# EAGLE board GOTEK Speaker Curcuit (EAGLE 9.6.1)
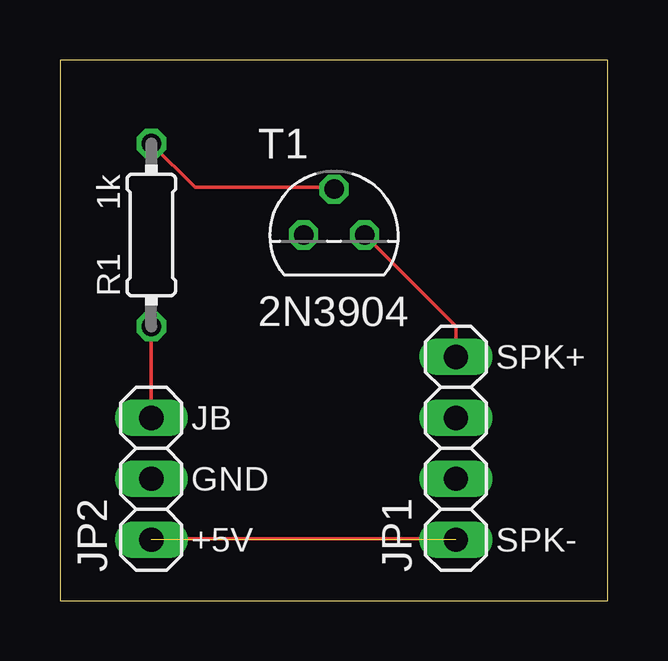
[diagram p0: board, top side]
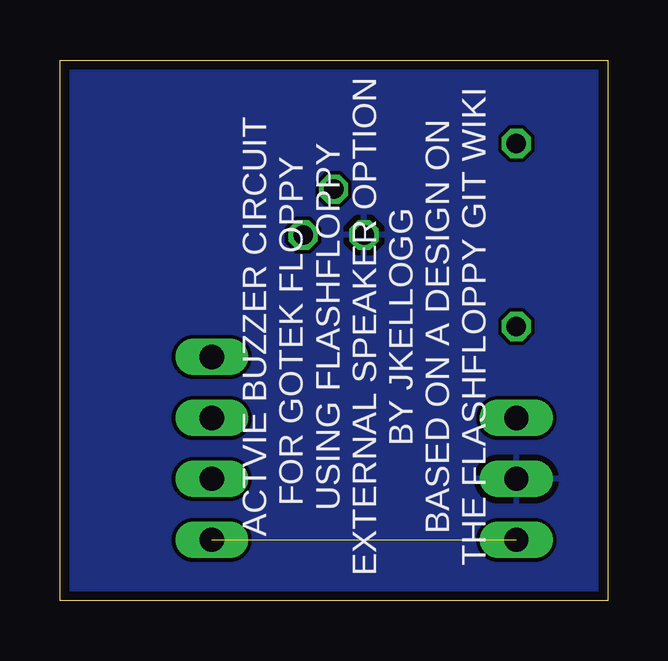
[diagram p1: board, bottom side, seen from below]

Size 22.84 x 22.53 mm. Coordinates in mm from the lower left corner, seen from the top.
Outline: 0,0 22.84,0 22.84,22.53 0,22.53 0,0
Copper layers (1*16): Top 0.035559375mm / dielectric 1.6mm / Bottom 0.035559375mm
Design rules "oshpark-2layer": minimum track width 6mil, minimum drill 10mil, track to track 6mil, track to pad 6mil, pad to pad 6mil, via to via 6mil, smd to smd 6mil, copper to edge 15mil, drill to drill 6mil, minimum pad ring 5mil, minimum via ring 5mil, stop-mask expansion 2.5mil, vias tented up to drill 0mil, thermal gap 10mil

## Footprints (pad centres in the part's own frame; a part is rotated, then mirrored left to right if it is on the bottom)
1X04 = drill 1.016 long: 1 -3.81,0; 2 -1.27,0; 3 1.27,0; 4 3.81,0
1X03 = drill 1.016 long: 1 -2.54,0; 2 0,0; 3 2.54,0
0204/7 = drill 0.813 octagon: 1 -3.81,0; 2 3.81,0
TO92 = drill 0.813 octagon: 1 1.27,0; 2 0,1.905; 3 -1.27,0

## Placement (x,y rotation side)
JP1  [1X04]  16.51,6.35 90 top
JP2  JP2  [1X03]  3.81,5.08 90 top
R1  1k  [0204/7]  3.81,15.24 90 top
T1  2N3904  [TO92]  11.43,15.24 0 top

## Library data of the parts
JP1 JP2 = pinhead
R1 = rcl; SPICEPREFIX: R
T1 = transistor

## Nets
+5V: JP1.1 JP2.1
GND: JP2.2 T1.3
JB: JP2.3 R1.1
N$2: R1.2 T1.2
SPK-: JP1.4 T1.1

## Tracks (layer width: path | path; a pad name or v marks a point on that pad's centre or on a via)
+5V  (1 unrouted)
  Top 0.152: 16.46,2.59 3.81,2.59 JP2.1
GND
  pour Bottom: 0,0 22.86,0 22.86,22.86 0,22.86
JB
  Top 0.152: JP2.3 R1.1
N$2
  Top 0.152: R1.2 5.64,17.22 11.43,17.22 T1.2
SPK-
  Top 0.152: T1.1 16.51,11.43 JP1.4

## Text on the board
tPlace: SPK+ | JB | GND | +5V | SPK-
bPlace: ACTVIE BUZZER CIRCUIT / FOR GOTEK FLOPPY / USING FLASHFLOPPY / EXTERNAL SPEAKER OPTION / BY JKELLOGG / BASED ON A DESIGN ON / THE FLASHFLOPPY GIT WIKI